# Altium PCB PCB.PcbDoc
Units mil, origin at the board's own origin, x right, y up, seen from the top; angles counter-clockwise.
Board outline 1779.53 x 1271.65 mil, 2 copper layers (Top Layer, Bottom Layer); 31 components, 26 nets, 137 pads, 0 vias.
Unrouted connection lines stored in the file: 76.
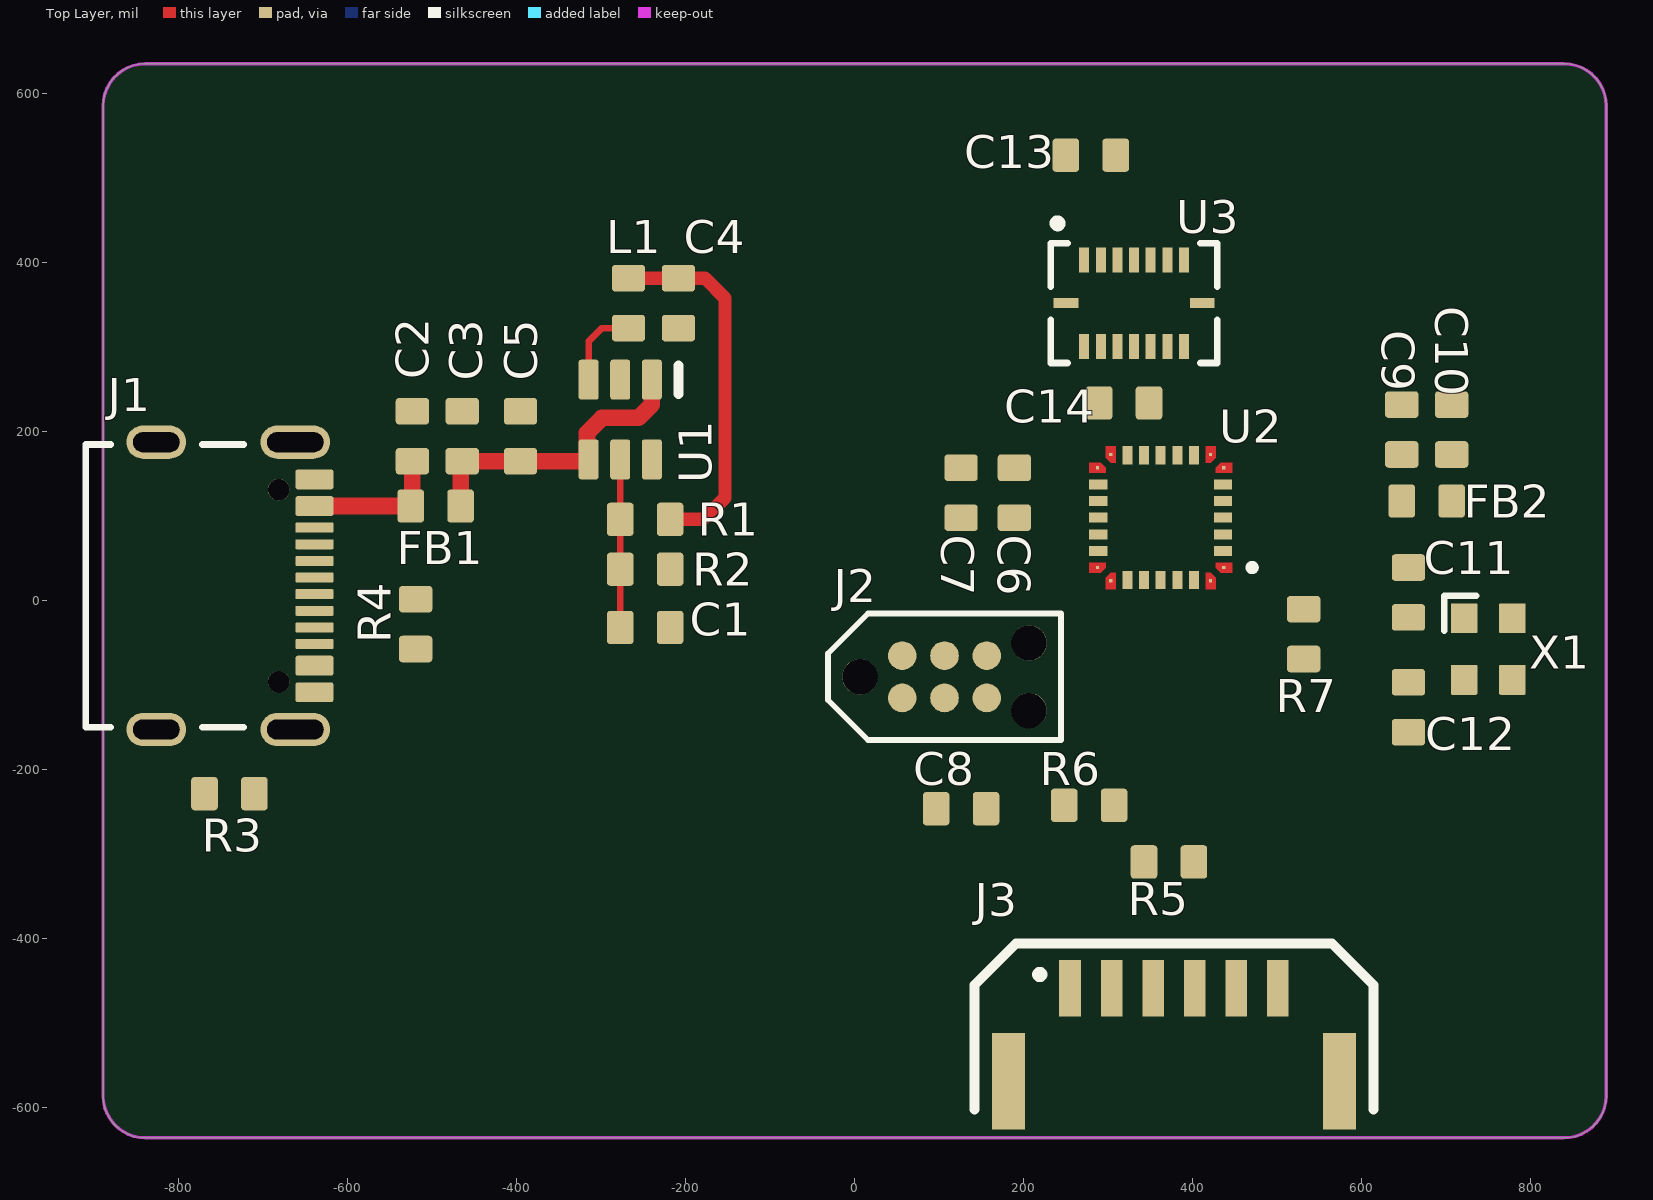
[diagram p0: Top Layer view]
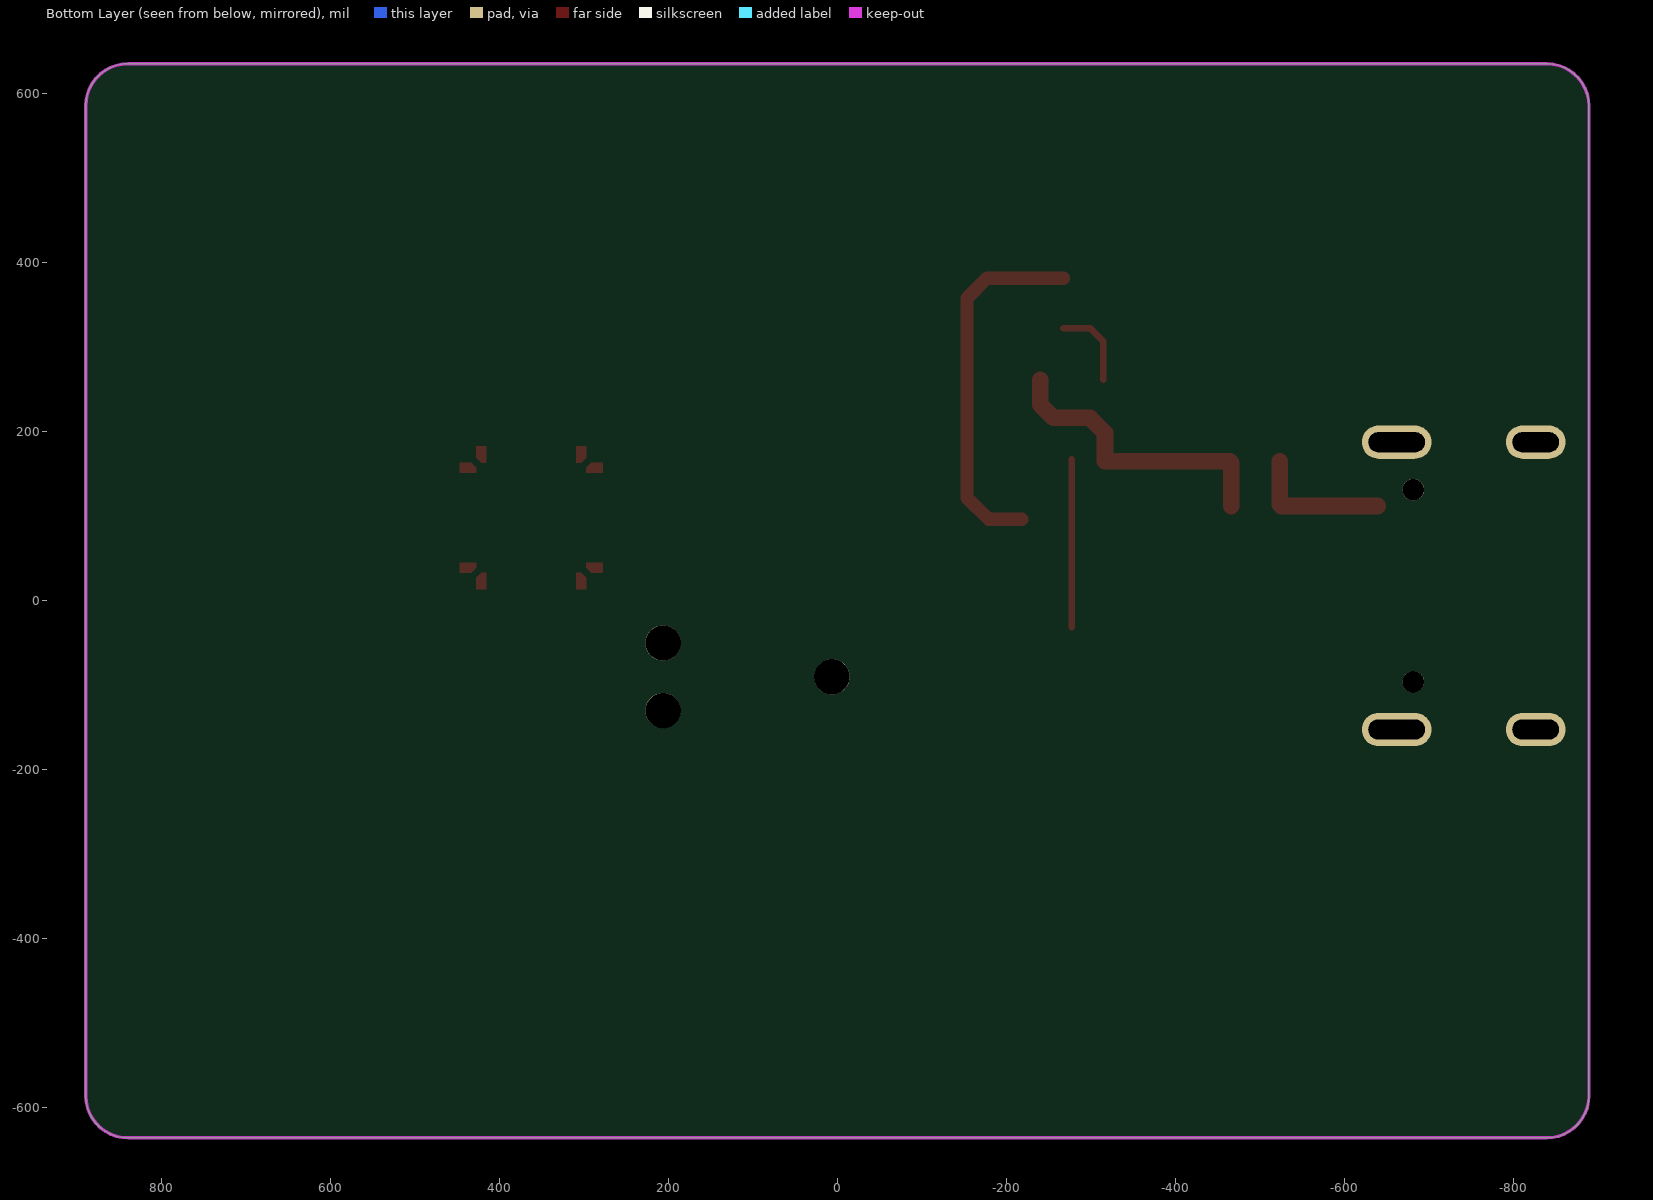
[diagram p1: Bottom Layer view, seen from below]

## Layer stack, top to bottom
Top Solder: solder mask 0.4, Solder Resist, Dk 3.5
Top Layer: signal copper 1.4
Dielectric 1: dielectric 12.6, FR-4, Dk 4.8
Bottom Layer: signal copper 1.4
Bottom Solder: solder mask 0.4, Solder Resist, Dk 3.5

## Board outline
-889.76,-585.83 ccw(c-839.76,-585.83) -839.76,-635.83 839.76,-635.83 ccw(c839.76,-585.83) 889.76,-585.83 889.76,585.83 ccw(c839.76,585.83) 839.76,635.83 -839.76,635.83 ccw(c-839.76,585.83) -889.76,585.83

## Design rules (kind name [scope] priority, off if disabled: settings)
Clearance [All] p1: gap=7.87 ignorepadtopadclearanceinfootprint=FALSE except(0: Arc-Hole Track-Hole SMDPad-Hole THPad-Hole Via-Hole Fill-Hole Poly-Hole Region-Hole Text-Hole; 5.91: Arc-Arc Arc-Track Arc-SMDPad Track-Track Track-SMDPad SMDPad-SMDPad; 11.81: Arc-THPad Track-THPad SMDPad-THPad THPad-THPad)
HoleToHoleClearance [All] p1: gap=8 allowstackedmicrovias=TRUE
MinimumSolderMaskSliver [All] p1: minsoldermaskwidth=5
PolygonConnect [All] p1: thpad.connectstyle=Relief thpad.reliefconductorwidth=10 thpad.reliefentries=4 thpad.polygonreliefangle="90 Angle" thpad.airgapwidth=10 smdpad.connectstyle=Relief smdpad.reliefconductorwidth=10 smdpad.reliefentries=4 smdpad.polygonreliefangle="90 Angle" smdpad.airgapwidth=10 via.connectstyle=Direct via.reliefconductorwidth=10 via.reliefentries=4 via.polygonreliefangle="90 Angle" via.airgapwidth=10
RoutingVias Best_Routing_Vias [All] p1: holewidth=10 width=18 viastyle="Through Hole" minholewidth=8 minwidth=16 maxholewidth=20 maxwidth=28
SolderMaskExpansion [All] p1: expansion=4 istentingtop=FALSE
UnRoutedNet [All] p1: checkbadconnections=TRUE
Width Best_Width [All] p1: maxlimit=20 minlimit=5 preferedwidth=10 minimp=50.000000 maximp=50.000000 favimp=50.000000
27 further rules are at their usual default settings.

## Classes and differential pairs
component class Power: C1 C2 C3 C4 C5 FB1 J1 L1 R1 R2 R3 R4 U1
component class Peripheral: C13 C14 J3 U3
component class Microcontroller: C6 C7 C8 C9 C10 C11 C12 FB2 J2 R5 R6 R7 U2 X1

## Components (designator, comment, footprint, x,y, rotation, side; value= is the part's Value field where it differs from the comment)
C1 "22pF" CAP_0603 -248.03,-31.5 r180 top
C2 "100nF" CAP_0603 -523.62,194.88 r270 top
C3 "100nF" CAP_0603 -464.57,194.88 r270 top
C4 "4u7" CAP_0603 -208.66,352.36 r90 top
C5 "4u7" CAP_0603 -395.67,194.88 r270 top
C6 "100nF" CAP_0603 188.98,127.95 r270 top
C7 "100nF" CAP_0603 125.98,127.95 r270 top
C8 "100nF" CAP_0603 125.98,-246.06 r180 top
C9 "100nF" CAP_0603 647.64,202.76 r270 top
C10 "100nF" CAP_0603 706.69,202.76 r270 top
C11 "10pF" CAP_0603 655.51,9.84 r270 top
C12 "10pF" CAP_0603 655.51,-125.98 r270 top
C13 "C0603" CAP_0603 279.53,527.56 r0 top value=100nF
C14 "C0603" CAP_0603 318.9,234.25 r0 top value=100nF
FB1 "120R" FB_0603 -496.06,112.2 r0 top
FB2 "120R" FB_0603 677.17,118.11 r0 top
J1 "USB4105-GF-A-060" USB4105-GF-A-060 -733.17,17.72 r270 top
J2 "TC2030-NL" TC2030-NL-FP 106.3,-89.96 r0 top
J3 "SM06B-GHS-TB" SM06B-GHS-TB 377.95,-513.78 r0 top
L1 "10uH" IND_0603 -267.72,352.36 r90 top
R1 "887k" RES_0603 -248.03,96.46 r0 top
R2 "280k" RES_0603 -248.03,37.4 r180 top
R3 "5k1" RES_0603 -740.16,-228.35 r0 top
R4 "5k1" RES_0603 -519.68,-27.56 r90 top
R5 "5k1" RES_0603 372.05,-309.06 r0 top
R6 "5k1" RES_0603 277.56,-242.13 r0 top
R7 "5k1" RES_0603 531.5,-39.37 r270 top
U1 "LTC3405ES6#TRMPBF" SOT-23-6 -277.56,214.57 r180 top
U2 "STM32F042G6U6" STM32F042G6U6 362.2,98.43 r180 top
U3 "BMI088" BMI088 330.71,352.36 r0 top
X1 "24MHz" XTAL_2520 750,-57.09 r270 top

## Footprints (in the part's own frame and the unit in brackets; to place one, negate y for a bottom-side part, rotate by r counter-clockwise, add the part's x,y. Pads: shape width x height; smd on the part's side, far side on the other; paste and mask are expansions set on the pad)
BMI088 [mm]
  rect 0.3x0.75 smd: 1(-1.5,1.3) 2(-1,1.3) 3(-0.5,1.3) 4(0,1.3) 5(0.5,1.3) 6(1,1.3) 7(1.5,1.3) 9(1.5,-1.3) 10(1,-1.3) 11(0.5,-1.3) 12(0,-1.3) 13(-0.5,-1.3) 14(-1,-1.3) 15(-1.5,-1.3)
  rect 0.75x0.3 smd: 8(2.05,0) 16(-2.05,0)
  silkscreen extent -2.5,-1.8 2.5,2.51, body extent -2.25,-1.5 2.25,1.5, height 1.01
CAP_0603 [mm]
  rrect25% 0.8x1 smd: 1(-0.75,0) 2(0.75,0)
  body extent -0.8,-0.4 0.8,0.4, height 0.51
FB_0603 [mm]
  rrect25% 0.8x1 smd: 1(-0.75,0) 2(0.75,0)
  body extent -0.8,-0.4 0.8,0.4, height 0.81
IND_0603 [mm]
  rrect25% 0.8x1 smd: 1(-0.75,0) 2(0.75,0)
  body extent -0.81,-0.37 0.81,0.37, height 0.87
RES_0603 [mm]
  rrect25% 0.8x1 smd: 1(-0.75,0) 2(0.75,0)
  body extent -0.8,-0.43 0.8,0.43, height 0.52
SM06B-GHS-TB [mm]
  rect 0.65x1.7 smd: 1(-3.125,1.4) 2(-1.875,1.4) 3(-0.625,1.4) 4(0.625,1.4) 5(1.875,1.4) 6(3.125,1.4)
  rect 1x2.9 smd: ""(-4.975,-1.4) ""(4.975,-1.4)
  silkscreen extent -6,-2.25 6,2.75, body extent -5.38,-2.8 5.38,2.05, height 4.26
SOT-23-6 [mm]
  rrect25% 0.6x1.2 smd: 1(-0.95,-1.2) 2(0,-1.2) 3(0.95,-1.2) 4(0.95,1.2) 5(0,1.2) 6(-0.95,1.2)
  silkscreen extent -1.75,-1.63 -1.75,-0.76, body extent -1.45,-1.4 1.45,1.4, height 1.45
STM32F042G6U6 [mm]
  rect 0.1x0.1 smd paste-1 mask+0: 1(-1.9,1.5) 7(-1.9,-1.5) 8(-1.5,-1.9) 14(1.5,-1.9) 15(1.9,-1.5) 21(1.9,1.5) 22(1.5,1.9) 28(-1.5,1.9)
  rect 0.55x0.3 smd: 2(-1.875,1) 3(-1.875,0.5) 4(-1.875,0) 5(-1.875,-0.5) 6(-1.875,-1) 16(1.875,-1) 17(1.875,-0.5) 18(1.875,0) 19(1.875,0.5) 20(1.875,1)
  rect 0.3x0.55 smd: 9(-1,-1.875) 10(-0.5,-1.875) 11(0,-1.875) 12(0.5,-1.875) 13(1,-1.875) 23(1,1.875) 24(0.5,1.875) 25(0,1.875) 26(-0.5,1.875) 27(-1,1.875)
  Top Layer region: -1.65,1.5 -1.65,1.35 -2.15,1.35 -2.15,1.65 -1.8,1.65
  Top Layer region: -1.65,-1.5 -1.8,-1.65 -2.15,-1.65 -2.15,-1.35 -1.65,-1.35
  Top Layer region: -1.35,-2.15 -1.65,-2.15 -1.65,-1.8 -1.5,-1.65 -1.35,-1.65
  Top Layer region: 1.65,-1.8 1.65,-2.15 1.35,-2.15 1.35,-1.65 1.5,-1.65
  Top Layer region: 2.15,-1.65 1.8,-1.65 1.65,-1.5 1.65,-1.35 2.15,-1.35
  Top Layer region: 2.15,1.35 1.65,1.35 1.65,1.5 1.8,1.65 2.15,1.65
  Top Layer region: 1.65,1.8 1.5,1.65 1.35,1.65 1.35,2.15 1.65,2.15
  Top Layer region: -1.35,1.65 -1.5,1.65 -1.65,1.8 -1.65,2.15 -1.35,2.15
  silkscreen extent -2.85,1.4 -2.65,1.6
TC2030-NL-FP [mil]
  round 33.98 smd paste-16.99: 1(-50,-25) 2(-50,25) 3(0,-25) 4(0,25) 5(50,-25) 6(50,25)
  round 42.01 hole 42.01 unplated: MH(-100,0) MH(100,-40) MH(100,40)
  silkscreen extent -138,-75 138,75
USB4105-GF-A-060 [mm]
  rrect25% 0.6x1.15 smd mask+0.05: A1B12(-3.2,2.378) A4B9(-2.4,2.378) B1A12(3.2,2.378) B4A9(2.4,2.378)
  rrect25% 0.3x1.15 smd mask+0.05: A5(-1.25,2.378) A6(-0.25,2.378) A7(0.25,2.378) A8(1.25,2.378) B5(1.75,2.378) B6(0.75,2.378) B7(-0.75,2.378) B8(-1.75,2.378)
  round 0.65 hole 0.65 unplated mask+0.05: MH(-2.89,1.303) MH(2.89,1.303)
  oval 1x2.1 hole 0.6 slot 1.7 at 90 deg: SH(-4.32,1.803) SH(4.32,1.803)
  oval 1x1.8 hole 0.6 slot 1.4 at 90 deg: SH(-4.32,-2.377) SH(4.32,-2.377)
  silkscreen extent -4.25,-4.5 4.25,0.25, body extent -4.47,-4.97 4.47,2.73, height 3.27
XTAL_2520 [mm]
  rrect10% 0.9x0.8 smd mask+0: 1(-0.925,-0.725) 2(0.925,-0.725) 3(0.925,0.725) 4(-0.925,0.725)
  silkscreen extent -1.6,-1.33 -0.54,-0.36, body extent -1.25,-1 1.25,1, height 0.8

## Part data
C1 C2 C3 C4 C5 C6 C7 C8 C9 C10 C11 C12 C13 C14: library part CAP_0603, "Capacitor SMD 0603"
FB1 FB2: library part FB_0603, "Ferrite Bead SMD 0603"
J1: "USB Connector Type C SMT 12 Pin", Manufacturer=GCT, Distributor Link=https://eu.mouser.com/ProductDetail/GCT/USB4105-GF-A-060?qs=QNEnbhJQKvY2mocwNJzgfA%3D%3D, Manufacturer Part Number=USB4105-GF-A-060
J2: "Tag-Connect No-Solder SWD Debug Connector (No Legs) DO NOT PLACE", Manufacturer=Tag-Connect, Manufacturer Part Number=TC2030-NL-FP
J3: "Header Connector 6 Position 1.25MM Pitch SMD Horizontal JST GH", Manufacturer=JST, Manufacturer Part Number=SM06B-GHS-TB
L1: library part IND_0603, "Inductor SMD 0603"
R1 R2 R3 R4 R5 R6 R7: library part RES_0603, "Resistor SMD 0603"
U1: "1.5MHz, 300mA / Synchronous Step-Down / Regulator in ThinSOT", Manufacturer="Analog Devices", Manufacturer Part Number=LTC3405ES6#TRMPBF
U2: "ARMÂ® CortexÂ®-M0 STM32F0 Microcontroller IC 32-Bit 48MHz 32KB _32K x 8_ FLASH 28-UFQFPN _4x4_", Package="UFQFN-28 STMicroelectronics", Availability=Unavailable, MF=STMicroelectronics, MP=STM32F042G6U6, Price=None, SnapEDA_Link=https://www.snapeda.com/parts/STM32F042G6U6/STMicroelectronics/view-part/225452/?ref=snap
U3: "Inertial Measurement Unit IMU 6-Axis LGA", Manufacturer=Bosch, Manufacturer Part Number=BMI088
X1: library part XTAL_2520, "Crystal SMD 2520"

## Nets (pads, with @x,y where several pads share a name; then routed paths per layer and width w, separated by ;. In a path a pad name is that pad's centre, name@x,y a point inside that pad or via, vN(x,y) a via of type N, cw(c..) or ccw(c..) an arc to the next point about the centre after c; other vN are vias at no path point)
+3V3: C1.1 C4.2 C6.2 C7.2 C10.2 C13.2 C14.2 FB2.2 J2.1 J3.1 L1.2 R1.2 R5.1 R6.1 U2.17 U2.18 U3.3 U3.11 | length 435.7
  Top Layer w15.75: L1.2 C4.2 -177.17,381.89 -153.54,358.27 -153.54,122.05 -179.13,96.46 R1.2
+3V3A: C9.2 FB2.1 U2.5
+5V: C3.2 C5.2 FB1.2 U1.1 U1.4 | length 355.2
  Top Layer w19.68: FB1.2 -466.54,163.39 C3.2 C5.2 -316.93,165.35 -316.93,198.82 -299.21,216.54 -255.91,216.54 -240.16,232.28 U1.1
BOOT0: R7.1 U2.1
GND: C2.1 C3.1 C4.1 C5.1 C6.1 C7.1 C8.1 C9.1 C10.1 C11.1 C12.1 C13.1 C14.1 J1.A1B12 J1.B1A12 J2.5 J3.2 J3.4 J3.6 R2.1 R3.1 R4.1 R7.2 U1.2 U1.6 U2.16 U3.2 U3.4 U3.6 U3.7 X1.2 X1.4
I2C_SCL: J3.3 R6.2 U2.27
I2C_SDA: J3.5 R5.2 U2.28
IMU_ACC: U2.8 U3.14
IMU_GYR: U2.9 U3.5
IMU_INT1: U2.15 U3.16
IMU_INT2: U2.14 U3.12
IMU_MISO: U2.12 U3.10 U3.15
IMU_MOSI: U2.13 U3.9
IMU_SCK: U2.11 U3.8
NetC1_2: C1.2 R1.1 R2.2 U1.5 | length 198.8
  Top Layer w7.87: C1.2 R2.2 R1.1 U1.5
NetJ1_A5: J1.A5 R4.2
NRST: C8.2 J2.3 U2.4
OSC_IN: C12.2 U2.2 X1.3
OSC_OUT: C11.2 U2.3 X1.1
SW: L1.1 U1.3 | length 99
  Top Layer w7.87: U1.3 -314.96,307.09 -299.21,322.83 L1.1
SWCLK: J2.4 U2.22
SWDIO: J2.2 U2.21
USB_CC2: J1.B5 R3.2
USB_D_N: J1.A7 J1.B7 U2.19
USB_D_P: J1.A6 J1.B6 U2.20
VBUS: C2.2 FB1.1 J1.A4B9 J1.B4A9 | length 167.9
  Top Layer w7.87: FB1.1 FB1.1@-523.62,114.17
  Top Layer w19.68: J1.A4B9 FB1.1 ; FB1.1@-523.62,114.17 C2.2
pads on no net: J1.A8 J1.B8 J1.MH J1.SH J2.6 J2.MH J3. U2.6 U2.7 U2.10 U2.23 U2.24 U2.25 U2.26 U3.1 U3.13

## Keep-outs
Keep-Out Layer:
  lines w3.94: -889.76,-585.83 ccw(c-839.76,-585.83) -839.76,-635.83 839.76,-635.83 ccw(c839.76,-585.83) 889.76,-585.83 889.76,585.83 ccw(c839.76,585.83) 839.76,635.83 -811.02,635.83 -839.76,635.83 ccw(c-839.76,585.83) -889.76,585.83 -889.76,-585.83